# Altium PCB POWERpcbprj.PcbDoc
Units mm, origin at the board's own origin, x right, y up, seen from the top; angles counter-clockwise.
Board outline 152.4 x 101.6 mm, 2 copper layers (Top Layer, Bottom Layer); 27 components, 25 nets, 139 pads, 13 vias.
Unrouted connection lines stored in the file: 8.
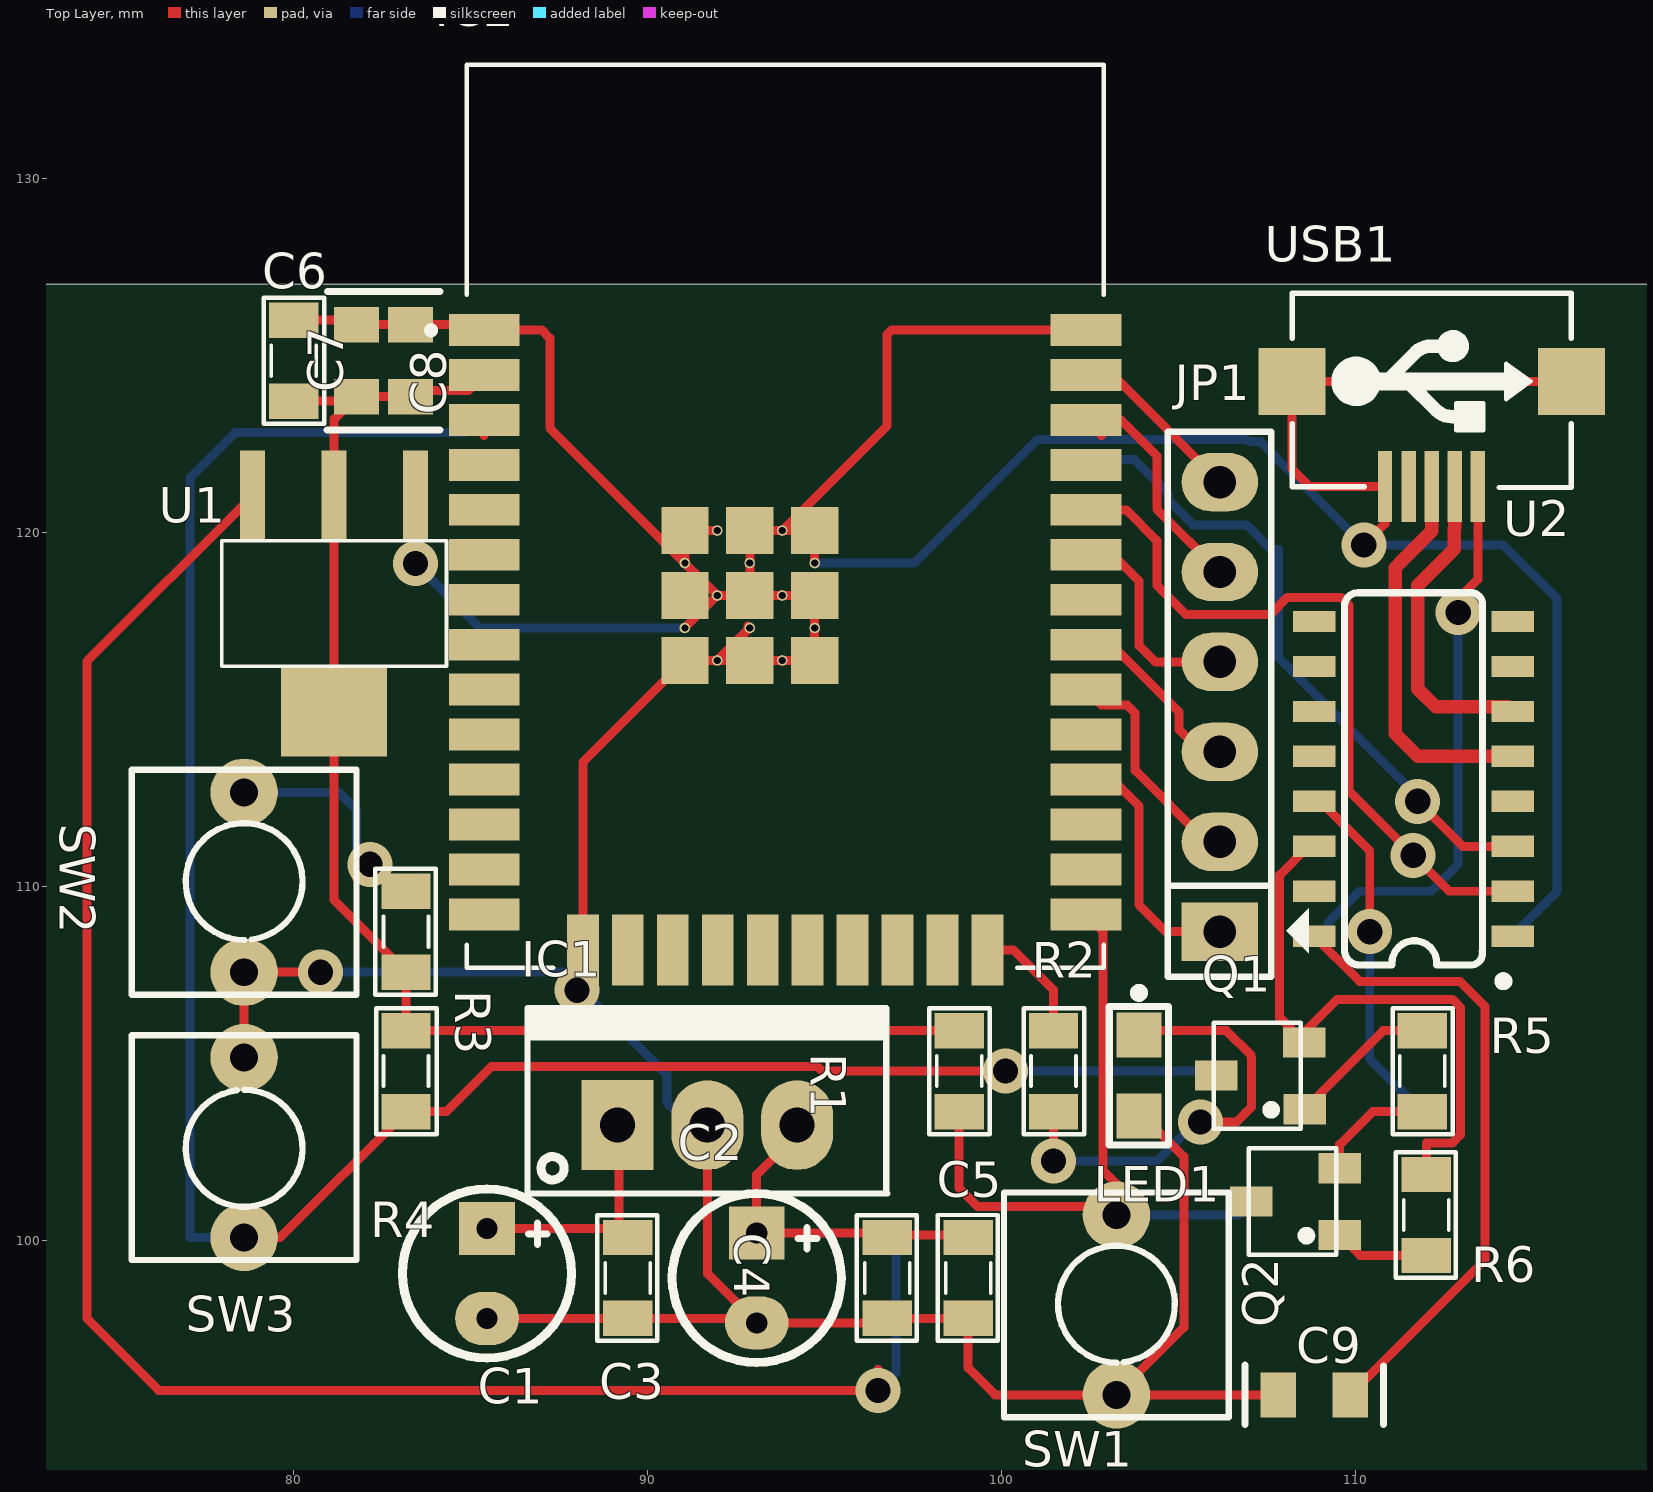
[diagram p0: Top Layer view]
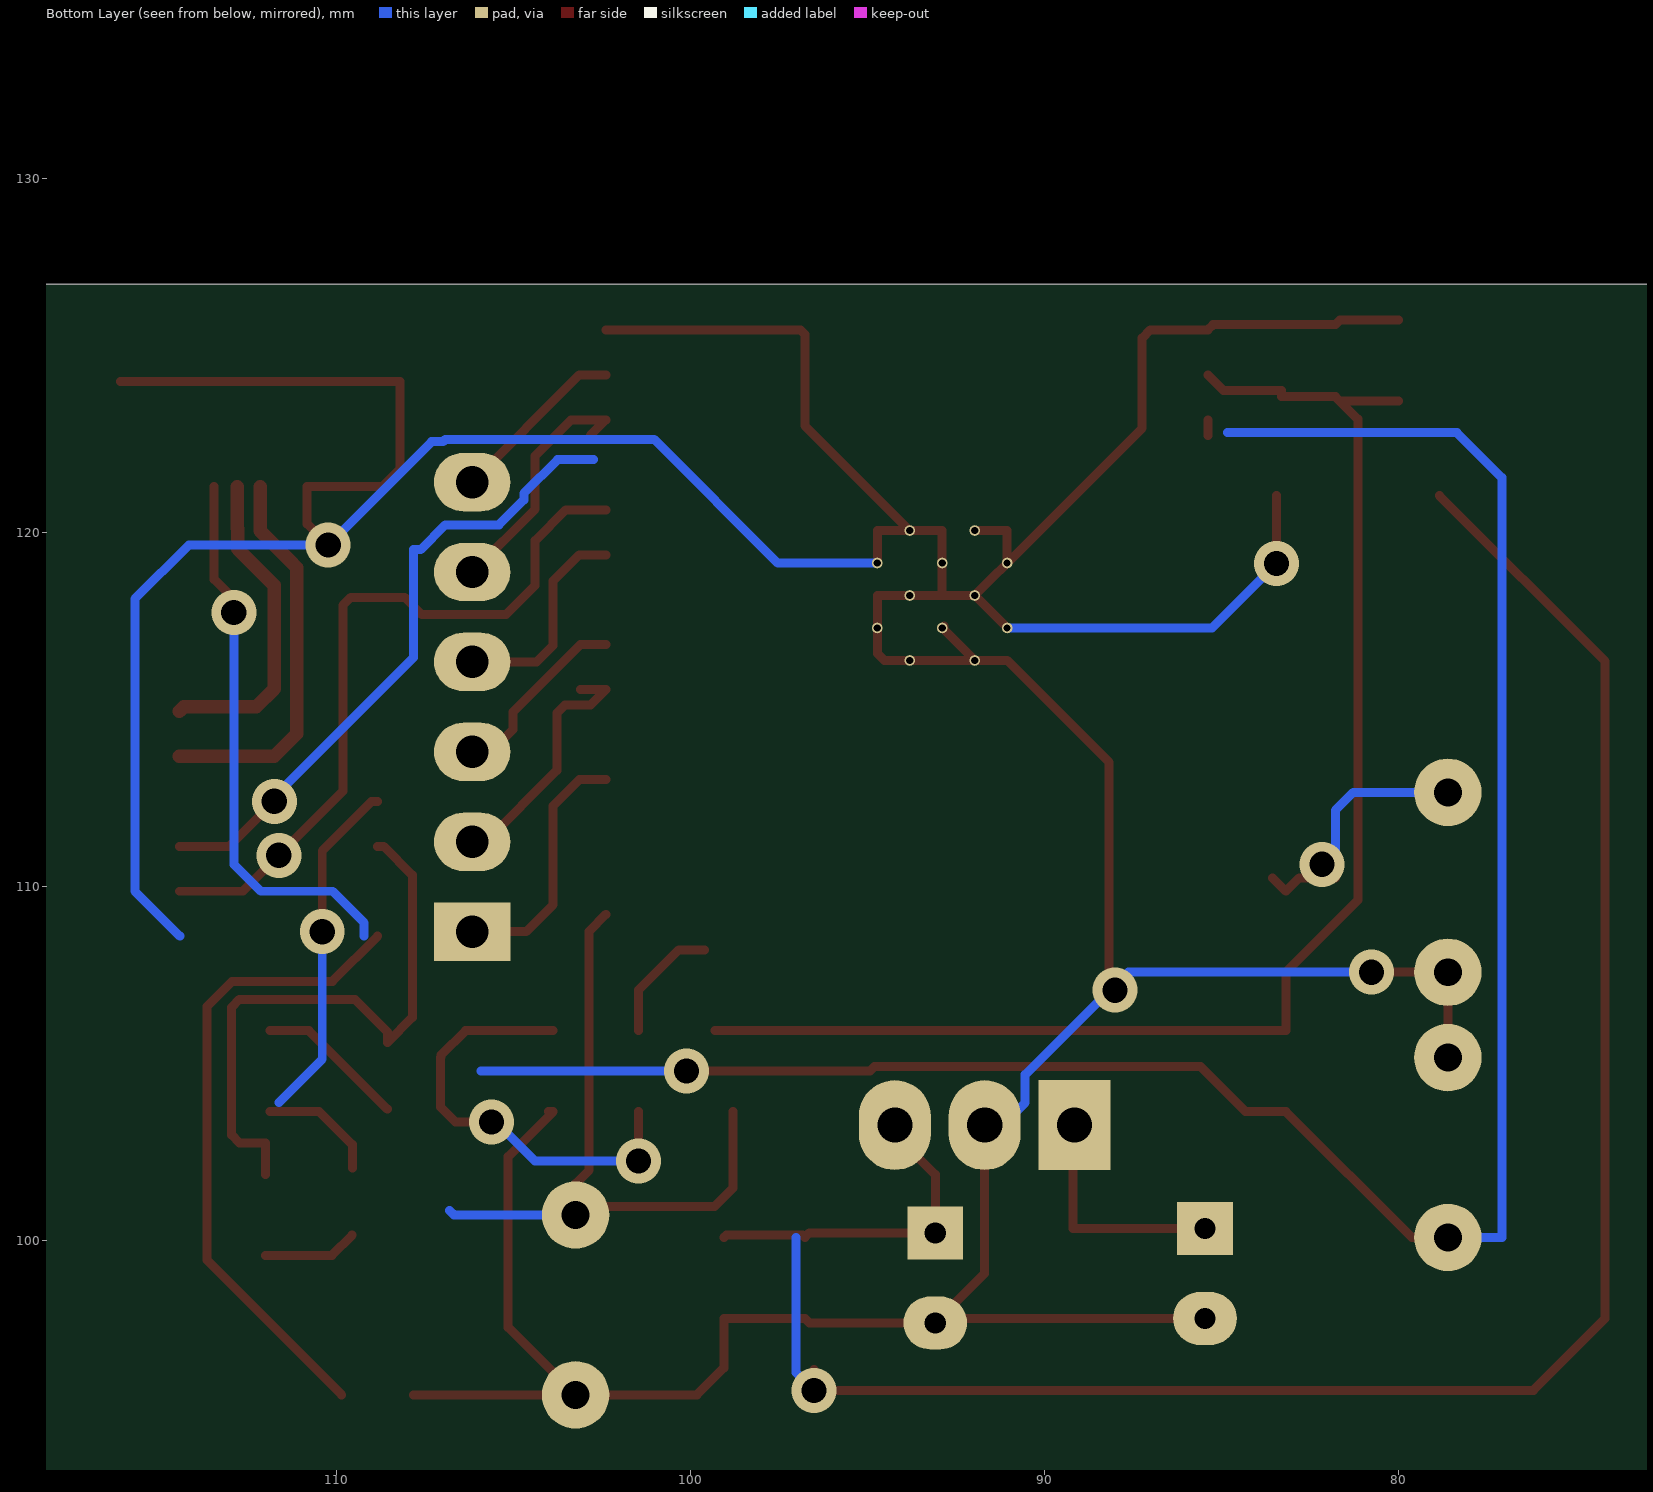
[diagram p1: Bottom Layer view, seen from below]
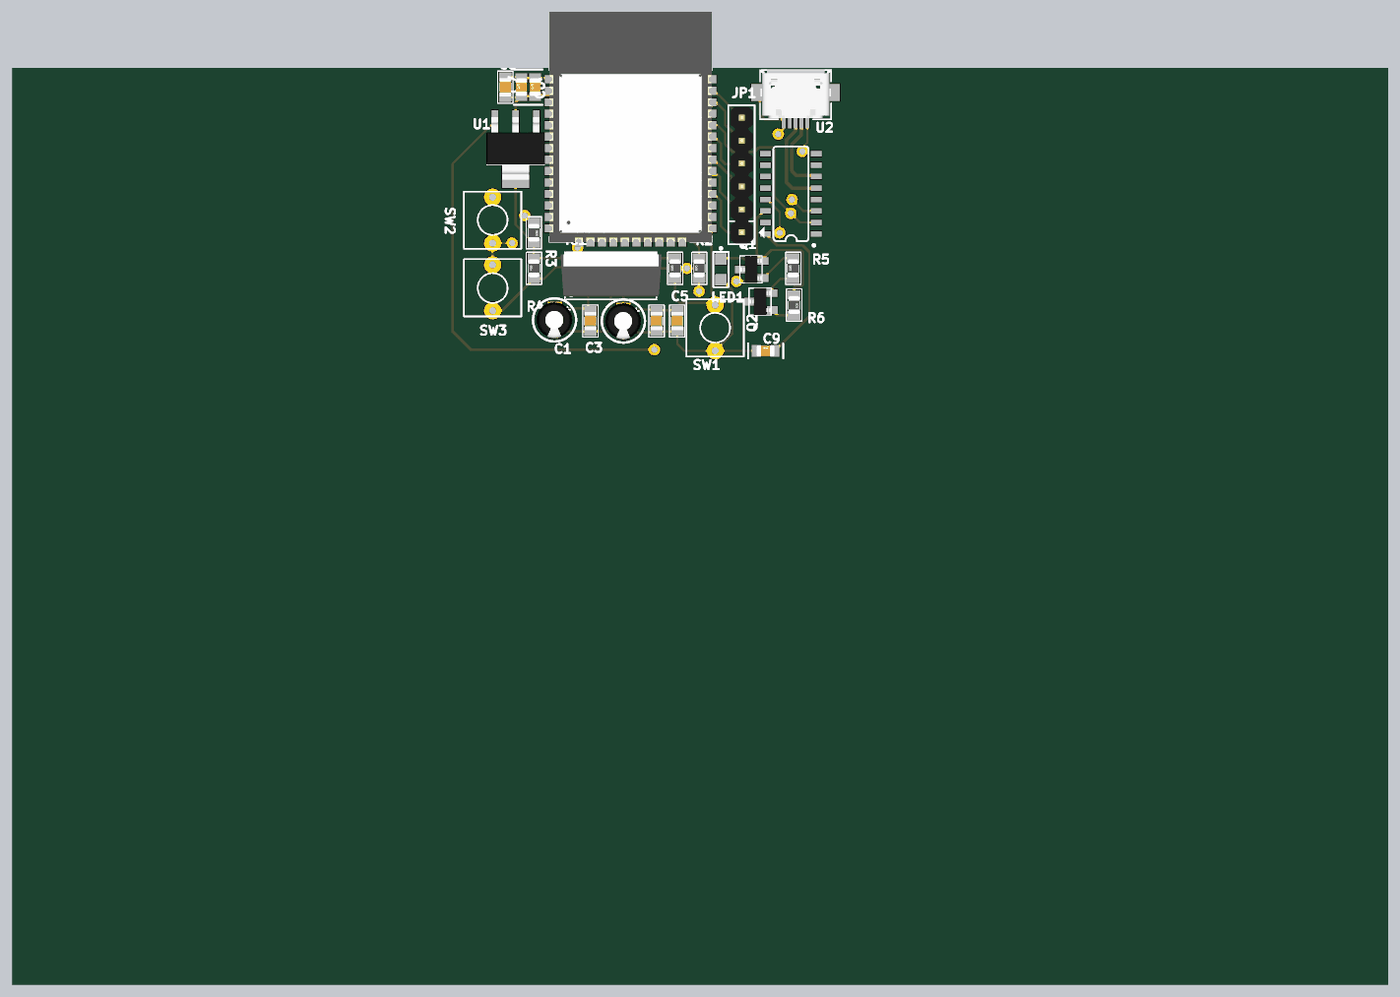
[diagram p2: 3D render of the assembled board from above, using the file's embedded part models]

## Layer stack, top to bottom
Top Solder: solder mask 0.0102, Solder Resist, Dk 3.5
Top Layer: signal copper 0.0356
Dielectric 1: dielectric 0.32, FR-4, Dk 4.8
Bottom Layer: signal copper 0.0356
Bottom Solder: solder mask 0.0102, Solder Resist, Dk 3.5

## Board outline
25.4,25.4 177.8,25.4 177.8,127 25.4,127

## Design rules (kind name [scope] priority, off if disabled: settings)
Clearance [All] p1: gap=0.254 ignorepadtopadclearanceinfootprint=FALSE except(0: Arc-Hole Track-Hole SMDPad-Hole THPad-Hole Via-Hole Fill-Hole Poly-Hole Region-Hole Text-Hole)
DiffPairsRouting [All] p1: maxlimit=0.254 minlimit=0.254 mostfreqgap=0.254 toplayer_minwidth=0.381 toplayer_maxwidth=0.381 toplayer_prefwidth=0.381 bottomlayer_minwidth=0.381 bottomlayer_maxwidth=0.381 bottomlayer_prefwidth=0.381 maxuncoupledlength=12.7
PolygonConnect [All] p1: connectstyle=Relief reliefconductorwidth=0.254 reliefentries=4 polygonreliefangle="90 Angle" airgapwidth=0.254
RoutingVias [All] p1: holewidth=0.711 width=1.27 viastyle="Through Hole" minholewidth=0.711 minwidth=1.27 maxholewidth=0.711 maxwidth=1.27
SolderMaskExpansion [All] p1: expansion=0.102
Width [All] p1: maxlimit=0.254 minlimit=0.254 preferedwidth=0.254
29 further rules are at their usual default settings.

## Classes and differential pairs
differential pair class diff: D0
component class MCU: C7 C8 C9 IC2 JP1 LED1 Q1 Q2 R1 R2 R3 R4 R5 R6 SW1 SW3 USB1
component class POWER: C1 C2 C3 C4 C5 C6 U1
differential pair D0: +D0_P -D0_N

## Components (designator, comment, footprint, x,y, rotation, side; value= is the part's Value field where it differs from the comment)
C1 "25V/10uF" C3MM 85.471,99.06 r270 top
C2 "10V/1uF" C3MM 93.091,98.933 r270 top
C3 "100nF" CAP_0805 89.449,98.933 r270 top value=33p
C4 "100nF" CAP_0805 96.774,98.933 r270 top value=33p
C5 "10uF" CAP_0805 99.06,98.933 r270 top value=33p
C6 "22uF" CAP_0805 80.01,124.841 r90 top value=33p
C7 "10uF" C0805 83.312,124.841 r90 top value=33p
C8 "10uF" C0805 81.788,124.841 r90 top value=33p
C9 "100nF" C0805 108.839,95.631 r0 top value=33p
IC1 "LM7805" QTO-220 89.154,103.251 r0 top
IC2 "ESP32-WROOM-32" MODULE_ESP32-WROOM-32 93.894,120.448 r0 top
JP1 "JP6 PIN" JP6 106.172,108.712 r90 top value=JP7
LED1 "LED" LED0805 103.886,104.648 r270 top value="LED 3 ly Single Colour"
Q1 "C1815" SOT23D 107.315,104.648 r90 top
Q2 "C1815" SOT23D 108.311,101.092 r90 top
R1 "10k" RES-SMD-0805 98.806,104.775 r90 top
R2 "Resistor - SMD" RES-SMD-0805 101.473,104.775 r90 top
R3 "10k" RES-SMD-0805 83.185,108.712 r270 top
R4 "10k" RES-SMD-0805 83.185,104.775 r90 top
R5 "10k" RES-SMD-0805 111.887,104.775 r90 top
R6 "10k" RES-SMD-0805 112.001,100.711 r270 top
SW1 "SW" SW2 103.251,100.711 r270 top value="SW chip 2 pin"
SW2 "SW" SW2 78.613,112.649 r270 top value="SW chip 2 pin"
SW3 "SW" SW2 78.613,100.076 r90 top value="SW chip 2 pin"
U1 "LM1117-ADJ" LM1117-SOP 81.153,119.761 r180 top
U2 "CH340C" SOP-16 111.639,113.03 r90 top
USB1 "USB" USB-M1 112.156,121.285 r0 top

## Footprints (in the part's own frame and the unit in brackets; to place one, negate y for a bottom-side part, rotate by r counter-clockwise, add the part's x,y. Pads: shape width x height; smd on the part's side, far side on the other; paste and mask are expansions set on the pad)
C3MM [mm]
  rect 1.5x1.58 hole 0.6: 1(-1.27,0)
  oval 1.5x1.8 hole 0.6: 2(1.27,0)
  silkscreen extent -2.39,-2.39 2.39,2.39, body extent -2,-2.03 1.99,1.97, height 7.01
C0805 [mm] "Chip Resistor; Body 2.0 x 1.3 mm (LxW typ)"
  rect 1x1.27 smd: 1(-1.016,0) 2(1.016,0)
  silkscreen extent -1.96,-0.84 1.96,0.84, body extent -1,-0.62 1,0.63, height 0.78
CAP_0805 [mil]
  rect 39.37x55 smd: 1(-45,0) 2(45,0)
  silkscreen extent -70,-34 70,33, body extent -40,-25 40,25, height 24
JP6 [mil] "JP6"
  rect 65x85 hole 36: 1(0,0)
  oval 65x85 hole 36: 2(100,0) 3(200,0) 4(300,0) 5(400,0) 6(500,0)
  silkscreen extent -50,-99 556,58, body extent -48,-50 548,48, height 323
LED0805 [mil] "Chip Resistor; Body 2.0 x 1.3 mm (LxW typ)"
  rect 50x50 smd: 1(-45,0) 2(45,0)
  silkscreen extent -97,-33 77,33, body extent -60,-25 60,25, height 47
LM1117-SOP [mm]
  rect 0.7x2.54 smd: 1(-2.3,-1.27) 2(0,-1.27) 3(2.3,-1.27)
  rect 3x2.54 smd: 2(0,4.826)
  silkscreen extent -3.18,0 3.17,3.56, body extent -3.25,-1.78 3.25,5.18, height 1.68
MODULE_ESP32-WROOM-32 [mm]
  rect 2x0.9 smd: 1(-8.5,5.26) 2(-8.5,3.99) 3(-8.5,2.72) 4(-8.5,1.45) 5(-8.5,0.18) 6(-8.5,-1.09) 7(-8.5,-2.36) 8(-8.5,-3.63) 9(-8.5,-4.9) 10(-8.5,-6.17) 11(-8.5,-7.44) 12(-8.5,-8.71) 13(-8.5,-9.98) 14(-8.5,-11.25) 25(8.5,-11.25) 26(8.5,-9.98) 27(8.5,-8.71) 28(8.5,-7.44) 29(8.5,-6.17) 30(8.5,-4.9) 31(8.5,-3.63) 32(8.5,-2.36) 33(8.5,-1.09) 34(8.5,0.18) 35(8.5,1.45) 36(8.5,2.72) 37(8.5,3.99) 38(8.5,5.26)
  rect 0.9x2 smd: 15(-5.715,-12.25) 16(-4.445,-12.25) 17(-3.175,-12.25) 18(-1.905,-12.25) 19(-0.635,-12.25) 20(0.635,-12.25) 21(1.905,-12.25) 22(3.175,-12.25) 23(4.445,-12.25) 24(5.715,-12.25)
  rect 1.33x1.33 smd: 39_1(-2.835,-0.405) 39_2(-1,-0.405) 39_3(0.835,-0.405) 39_4(-2.835,-2.24) 39_5(-1,-2.24) 39_6(0.835,-2.24) 39_7(-2.835,-4.075) 39_8(-1,-4.075) 39_9(0.835,-4.075)
  round 0.3 hole 0.2: 39_10(-1.917,-0.405) 39_11(-0.082,-0.405) 39_12(-2.835,-1.322) 39_13(-1,-1.322) 39_14(0.835,-1.322) 39_15(-1.917,-2.24) 39_16(-0.082,-2.24) 39_17(-2.835,-3.157) 39_18(-1,-3.157) 39_19(0.835,-3.157) 39_20(-1.917,-4.075) 39_21(-0.082,-4.075)
  silkscreen extent -10.1,-12.75 9,12.75, body extent -9.02,-12.75 8.98,12.75, height 3.2
QTO-220 [mil] "TO-220 - 1-2-3"
  rect 80x100 hole 39: 1(0,0)
  oval 80x100 hole 39: 2(100,0) 3(200,0)
  silkscreen extent -100,-76 300,130, body extent -119,-64 322,121, height 755
RES-SMD-0805 [mil]
  rect 39.37x55 smd: 1(-45,0) 2(45,0)
  silkscreen extent -70,-34 70,33, body extent -39,-25 39,25, height 31
SOP-16 [mm]
  rect 0.6x1.2 smd: 1(-4.445,-2.8) 2(-3.175,-2.8) 3(-1.905,-2.8) 4(-0.635,-2.8) 5(0.635,-2.8) 6(1.905,-2.8) 7(3.175,-2.8) 8(4.445,-2.8) 9(4.445,2.8) 10(3.175,2.8) 11(1.905,2.8) 12(0.635,2.8) 13(-0.635,2.8) 14(-1.905,2.8) 15(-3.175,2.8) 16(-4.445,2.8)
  silkscreen extent -5.84,-2.67 5.26,1.95, body extent -4.95,-3.47 4.95,3.47, height 1.75
SOT23D [mm] "SOT 23C - 1-3-2 - BCE"
  rect 0.85x1.2 smd: 1(-0.95,-1.25) 2(0.94,-1.245) 3(0,1.25)
  silkscreen extent -1.5,-1.14 1.5,1.32, body extent -1.5,-1.17 1.5,1.33, height 1.06
SW2 [mil] "SW button 2pin, 250x 250 mil"
  round 75 hole 31: 1(0,0) 2(200,0)
  silkscreen extent -25,-125 225,125
USB-M1 [mm]
  rect 0.4x2 smd: 1(1.3,0) 2(0.65,0) 3(0,0) 4(-0.65,0) 5(-1.321,0)
  rect 1.9x1.9 smd: 5(-3.95,2.968) 5(3.95,2.968)
  silkscreen extent -3.94,-0.03 3.94,5.46, body extent -3.98,0.11 4,5.54, height 2.71

## Part data
C1 C2: library part "Cap Pol", "Polarized Capacitor (Axial)", LatestRevisionDate=17-Jul-2002, LatestRevisionNote="Re-released for DXP Platform.", PackageReference=POLAR0.8, Published=8-Jun-2000, Publisher="Altium Limited"
C3 C4 C5 C6 C7 C8 C9: library part CapSMD, "Capacitor", LatestRevisionDate=17-Jul-2002, LatestRevisionNote="Re-released for DXP Platform.", PackageReference=RAD-0.3, Published=8-Jun-2000, Publisher="Altium Limited"
IC1: library part LM78xx, "On ap +, from + 5 to + 24VDC"
IC2: "Bluetooth, WiFi Transceiver Module 2.4GHz ~ 2.5GHz Surface Mount", Package="Module Espressif Systems", Digi-Key_Part_Number=1904-1010-1-ND, Digi-Key_Purchase_URL=https://www.digikey.com/product-detail/en/espressif-systems/ESP32-WROOM-32/1904-1010-1-ND/8544305?utm_source=snapeda&utm_medium=aggregator&utm_campaign=symbol, MF="Espressif Systems", MP=ESP32-WROOM-32, SnapEDA_Link=https://www.snapeda.com/parts/ESP32-WROOM-32/Espressif%20Systems/view-part/2753322/?ref=snap
JP1: library part JP6
LED1: "LED Single colour Green and Red"
Q1 Q2: library part 2SC1815, "NPN 600mW, ECB"
R1 R3 R4 R5 R6: library part "Resistor - SMD", "Resistor", Manufacturer="Generic Components", Class=Passive, Published=08/06/2000, Publisher="Altium Hobart Technology Centre"
R2: "Resistor SMD", Manufacturer="Generic Components", Class=Passive, Published=08/06/2000, Publisher="Altium Hobart Technology Centre"
SW1 SW2 SW3: library part SW2, "Switch button 2 pin"
U1: "800mA Low-Dropout Linear Regulator", Creator="Nguyen Ba Bien", Website=http://group3i.net
U2: "USB to serial chip CH340", Package=Package, Availability=Unavailable, Check_prices=https://www.snapeda.com/parts/CH340C/WCH/view-part/5428851/?ref=eda, MF=WCH, MP=CH340C, Price=None, SnapEDA_Link=https://www.snapeda.com/parts/CH340C/WCH/view-part/5428851/?ref=snap
USB1: library part USB-M

## Via types
v1: diameter 1.27, hole 0.711, Top Layer to Bottom Layer, 13 vias

## Nets (pads, with @x,y where several pads share a name; then routed paths per layer and width w, separated by ;. In a path a pad name is that pad's centre, name@x,y a point inside that pad or via, vN(x,y) a via of type N, cw(c..) or ccw(c..) an arc to the next point about the centre after c; other vN are vias at no path point)
3V3: C6.1 C7.1 C8.1 IC2.2 R1.2 R3.2 R4.2 U1.2 | length 40.8
  Top Layer w0.254: C6.1 C8.1@81.661,123.698 ; IC2.2 84.955,124 83.312,124 C7.1 C8.1 C8.1@81.661,123.698 ; R1.2@99.314,105.918 R4.2 R3.2 81.153,109.601 81.153,114.935 81.153,121.031 81.153,123.19 C8.1@81.661,123.698
5V: C2.1 C4.1 C5.1 IC1.3 U1.3 | length 63.1
  Top Layer w0.254: U1.3 74.168,116.346 74.168,97.79 76.2,95.758 v1(96.52,95.758) v1@96.52,96.352 ; IC1.3 94.234,102.997 93.091,101.854 C2.1 96.647,100.203 C4.1 96.84,100.142 98.994,100.142 C5.1
  Bottom Layer w0.254: v1(96.52,95.758) 97.028,96.266 97.028,100.076
12V: C1.1 C3.1 IC1.1 | length 6.7
  Top Layer w0.254: C1.1 89.195,100.33 89.195,103.21 IC1.1
D0_N: U2.5 USB1.3 | length 11
  Top Layer w0.381: USB1.3 112.156,120.03 111.316,119.189 111.316,119.187 111.125,118.996 111.125,114.3 111.76,113.665 U2.5
D0_P: U2.6 USB1.2 | length 9.1
  Top Layer w0.381: USB1.2 112.806,120.106 112.791,120.091 112.791,119.522 111.76,118.491 111.76,115.57 112.268,115.062 114.312,115.062 U2.6
DTR: Q2.2 R5.1 U2.13 | length 13.1
  Top Layer w0.254: U2.13 109.008,112.395 110.405,110.998 v1(110.405,108.712) ; Q2.2 109.556,102.698 110.49,103.632 R5.1
  Bottom Layer w0.254: v1(110.405,108.712) 110.405,105.114 111.633,103.886
EN: IC2.3 Q1.3 R4.1 SW3.1 | length 61.1
  Top Layer w0.254: SW3.1 79.629,100.076 R4.1 84.328,103.632 85.598,104.902 94.813,104.902 94.94,104.775 v1(100.119,104.775) ; IC2.3@85.394,122.73 IC2.3
  Bottom Layer w0.254: SW3.1 77.089,100.076 77.089,121.539 78.359,122.809 84.836,122.809 ; v1(100.119,104.775) 105.918,104.775
GND: C1.2 C2.2 C3.2 C4.2 C5.2 C6.2 C7.2 C8.2 C9.1 IC1.2 IC2.1 IC2.15 IC2.38 IC2.39_1 IC2.39_2 IC2.39_3 IC2.39_4 IC2.39_5 IC2.39_6 IC2.39_7 IC2.39_8 IC2.39_9 IC2.39_10 IC2.39_11 IC2.39_12 IC2.39_13 IC2.39_14 IC2.39_15 IC2.39_16 IC2.39_17 IC2.39_18 IC2.39_19 IC2.39_20 IC2.39_21 LED1.2 SW1.2 SW2.2 SW3.2 U1.1 U2.1 USB1.5 | length 173.7
  Top Layer w0.254: SW3.2 SW2.2 v1(80.772,107.569) ; C6.2 81.661,125.984 C8.2 C7.2 85.245,125.857 IC2.1 87.017,125.708 87.249,125.476 87.249,122.936 IC2.39_12 ; v1(83.453,119.112) U1.1 ; C1.2 C3.2 C2.2@92.964,97.79 ; v1@88.138,106.934 v1(88.011,107.061) 88.179,107.229 IC2.15 88.179,113.493 IC2.39_7 IC2.39_20 ; IC2.39_17 IC2.39_15 ; IC1.2 91.694,99.06 C2.2@92.964,97.79 ; IC2.39_10 IC2.39_1 IC2.39_12 ; IC2.39_18@92.837,117.348 IC2.39_18 IC2.39_20 ; IC2.39_14 IC2.39_3 IC2.39_11 ; IC2.38 96.901,125.708 96.774,125.581 96.774,123.006 IC2.39_11 ; LED1.2@104.013,103.632 103.886,103.632 105.156,102.362 105.156,97.536 SW1.2 ; C9.1 SW1.2 ; v1(110.236,119.634) 110.835,120.233 110.835,121.285 108.712,121.285 108.206,121.791 108.206,124.253 USB1.5@116.106,124.253 ; IC2.39_12 91.518,118.667 IC2.39_15 ; IC2.39_20 IC2.39_8 IC2.39_21 94.529,116.373 94.729,116.573 IC2.39_19 IC2.39_6 IC2.39_16 IC2.39_5 ; IC2.39_15 IC2.39_5 ; IC2.39_5 IC2.39_13 IC2.39_2 IC2.39_11 ; C2.2@92.964,97.79 C2.2 96.647,97.663 C4.2 C5.2 99.06,96.393 99.822,95.631 SW1.2
  Bottom Layer w0.254: v1(80.772,107.569) 87.63,107.569 ; v1(83.453,119.112) 85.274,117.291 IC2.39_17 ; v1(88.011,107.061) 88.169,107.061 90.551,104.679 90.551,103.886 91.186,103.251 IC1.2 IC1.2@91.694,103.378 ; IC2.39_14 97.536,119.126 101.028,122.618 106.926,122.618 106.989,122.555 107.315,122.555 v1(110.236,119.634) 114.173,119.634 115.697,118.11 115.697,109.855 114.427,108.585
IO_0: IC2.25 Q2.3 R1.1 SW1.1 | length 19.3
  Top Layer w0.254: R1.1 98.806,101.473 99.322,100.957 SW1.1@103.251,100.957 ; IC2.25 102.87,108.723 102.87,101.981 103.251,101.6 SW1.1@103.251,100.957 ; SW1.1 SW1.1@103.251,100.957
  Bottom Layer w0.254: SW1.1 106.68,100.711 106.807,100.838
IO_2: IC2.24 R2.2 | length 3.5
  Top Layer w0.254: IC2.24 100.336,108.198 101.473,107.061 R2.2
IO_16: R3.1 SW2.1 | length 7.7
  Top Layer w0.254: v1(82.169,110.617) 81.788,110.236 82.804,110.236 R3.1 R3.1@83.566,110.236
  Bottom Layer w0.254: SW2.1 81.28,112.649 81.788,112.141 81.788,110.998 v1(82.169,110.617)
NetIC2_28: IC2.28 JP1.1 | length 7.2
  Top Layer w0.254: IC2.28 103.146,113.008 103.886,112.268 103.886,109.474 104.648,108.712 JP1.1
NetIC2_30: IC2.30 JP1.2 | length 7.2
  Top Layer w0.254: IC2.30@103.113,115.548 IC2.30 102.833,115.11 103.552,115.11 103.775,114.886 103.775,113.268 105.791,111.252 JP1.2
NetIC2_31: IC2.31 JP1.3 | length 5.5
  Top Layer w0.254: IC2.31 103.113,116.818 103.775,116.156 105.013,114.919 105.013,114.427 105.647,113.792 JP1.3 JP1.3@106.061,113.681
NetIC2_33: IC2.33 JP1.4 | length 6.1
  Top Layer w0.254: IC2.33 103.146,119.358 103.886,118.618 103.886,116.796 104.35,116.332 JP1.4
NetIC2_36: IC2.36 JP1.5 | length 7.1
  Top Layer w0.254: IC2.36@102.833,122.73 IC2.36 103.378,123.168 104.394,122.152 104.394,120.65 JP1.5
NetIC2_37: IC2.37 JP1.6 | length 5
  Top Layer w0.254: IC2.37 103.146,124.438 JP1.6
NetLED1_1: LED1.1 R2.1 | length 12.5
  Top Layer w0.254: v1(101.473,102.235) R2.1 ; LED1.1@103.886,105.918 106.359,105.918 107.046,105.231 107.046,105.171 107.061,105.156 107.061,103.759 106.636,103.334 v1(105.621,103.334)
  Bottom Layer w0.254: v1(101.473,102.235) 104.394,102.235 105.493,103.334 v1(105.621,103.334)
NetQ1_1: Q1.1 R5.2 | length 4.2
  Top Layer w0.254: Q1.1 110.785,105.918 R5.2
NetQ2_1: Q2.1 R6.2 | length 2.7
  Top Layer w0.254: Q2.1 110.135,99.568 R6.2
RST: Q1.2 R6.1 U2.14 | length 17.1
  Top Layer w0.254: U2.14 108.67,111.125 107.858,110.313 107.858,106.289 Q1.2 108.56,105.877 109.482,106.799 112.743,106.799 112.966,106.576 112.966,102.974 112.743,102.751 112.001,102.751 R6.1
RX: IC2.35 U2.3 | length 18.2
  Top Layer w0.254: v1(111.76,112.395) 113.03,111.125 U2.3
  Bottom Layer w0.254: 102.743,122.047 103.759,122.047 104.712,121.094 104.712,120.912 105.418,120.206 106.926,120.206 107.624,119.507 107.823,119.507 107.823,116.459 111.76,112.522 v1(111.76,112.395)
TX: IC2.34 U2.2 | length 20.7
  Top Layer w0.254: IC2.34 103.527,120.628 104.394,119.761 104.394,118.491 105.219,117.665 107.591,117.665 108.081,118.156 109.597,118.156 109.82,117.933 109.82,112.684 v1(111.633,110.871) 112.649,109.855 U2.2
V3: U2.4
VCC: C9.2 U2.16 USB1.1 | length 34.4
  Top Layer w0.254: U2.16 110.117,107.307 112.954,107.307 113.665,106.596 113.665,99.441 C9.2 ; v1(112.903,117.729) 112.522,117.729 113.456,118.663 USB1.1
  Bottom Layer w0.254: 109.22,108.585 109.22,108.964 110.111,109.855 112.141,109.855 112.903,110.617 v1(112.903,117.729)
pads on no net: IC2.4 IC2.5 IC2.6 IC2.7 IC2.8 IC2.9 IC2.10 IC2.11 IC2.12 IC2.13 IC2.14 IC2.16 IC2.17 IC2.18 IC2.19 IC2.20 IC2.21 IC2.22 IC2.23 IC2.26 IC2.27 IC2.29 IC2.32 U2.7 U2.8 U2.9 U2.10 U2.11 U2.12 U2.15 USB1.4

## Text inside footprints (layer, text, board x,y; h text height)
IC2: Mechanical 13 "ANTENNA" at 87.894,129.448 h1.78